# Altium PCB 20240913_WLAN_ESP32.PcbDoc
Units mm, origin at the board's own origin, x right, y up, seen from the top; angles counter-clockwise.
Board outline 30 x 54 mm, 2 copper layers (Top Layer, Bottom Layer), stack 1.471 mm thick; 28 components, 22 nets, 138 pads, 36 vias.
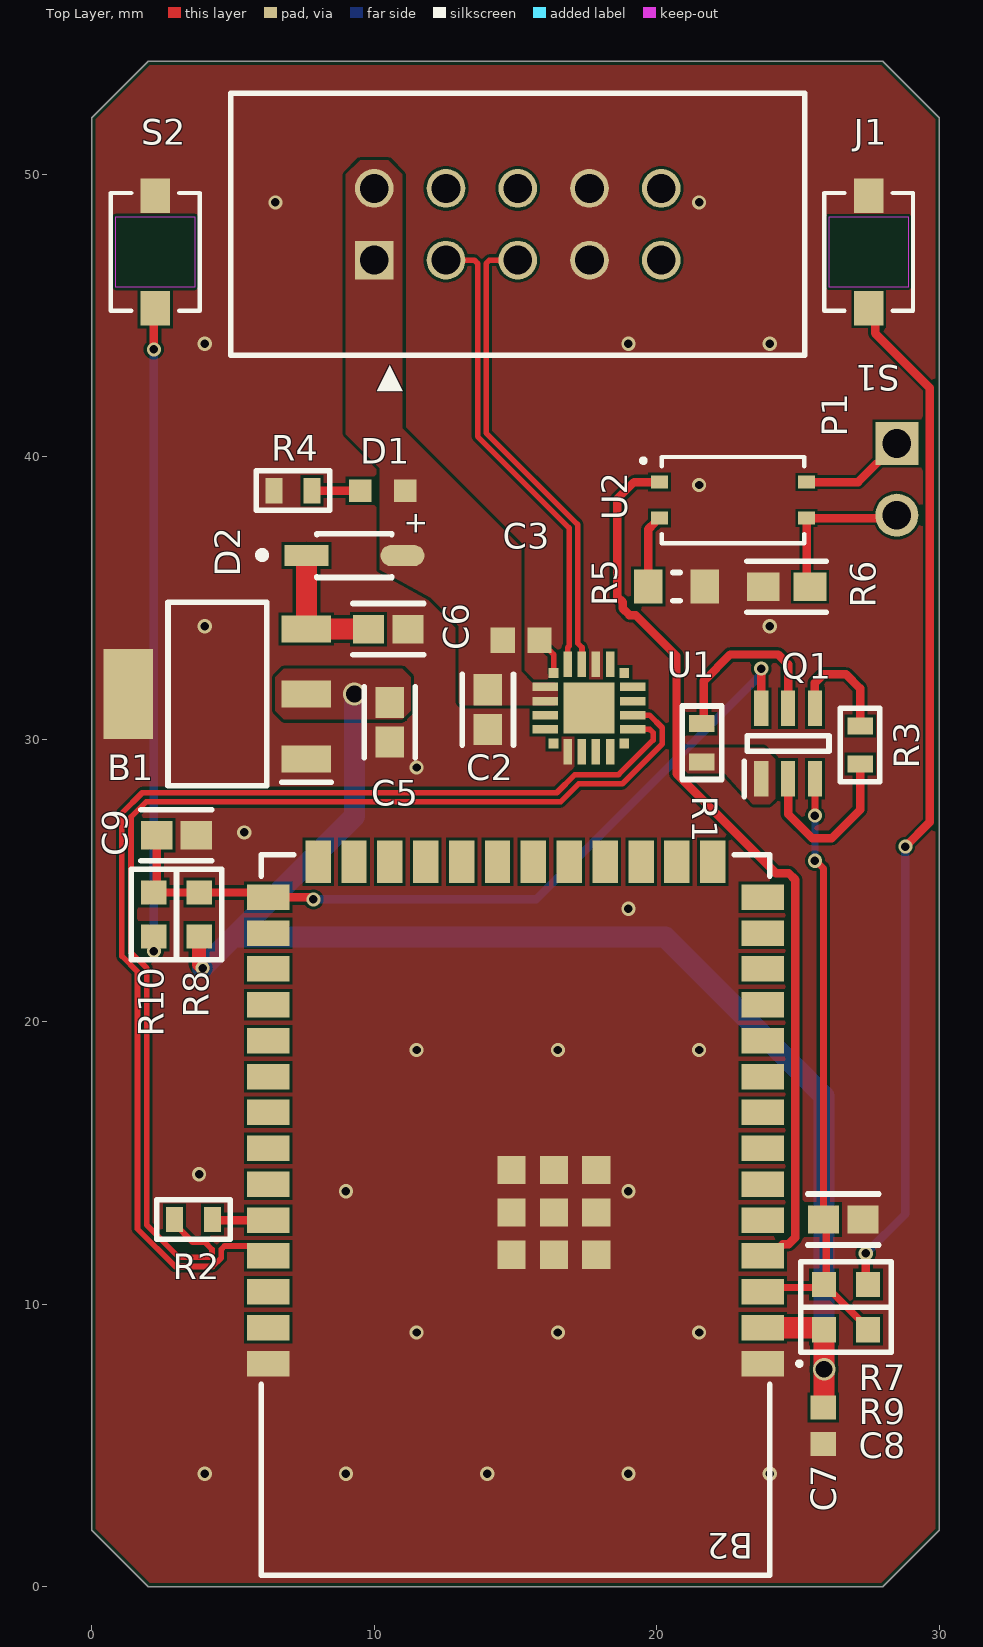
[diagram p0: Top Layer view]
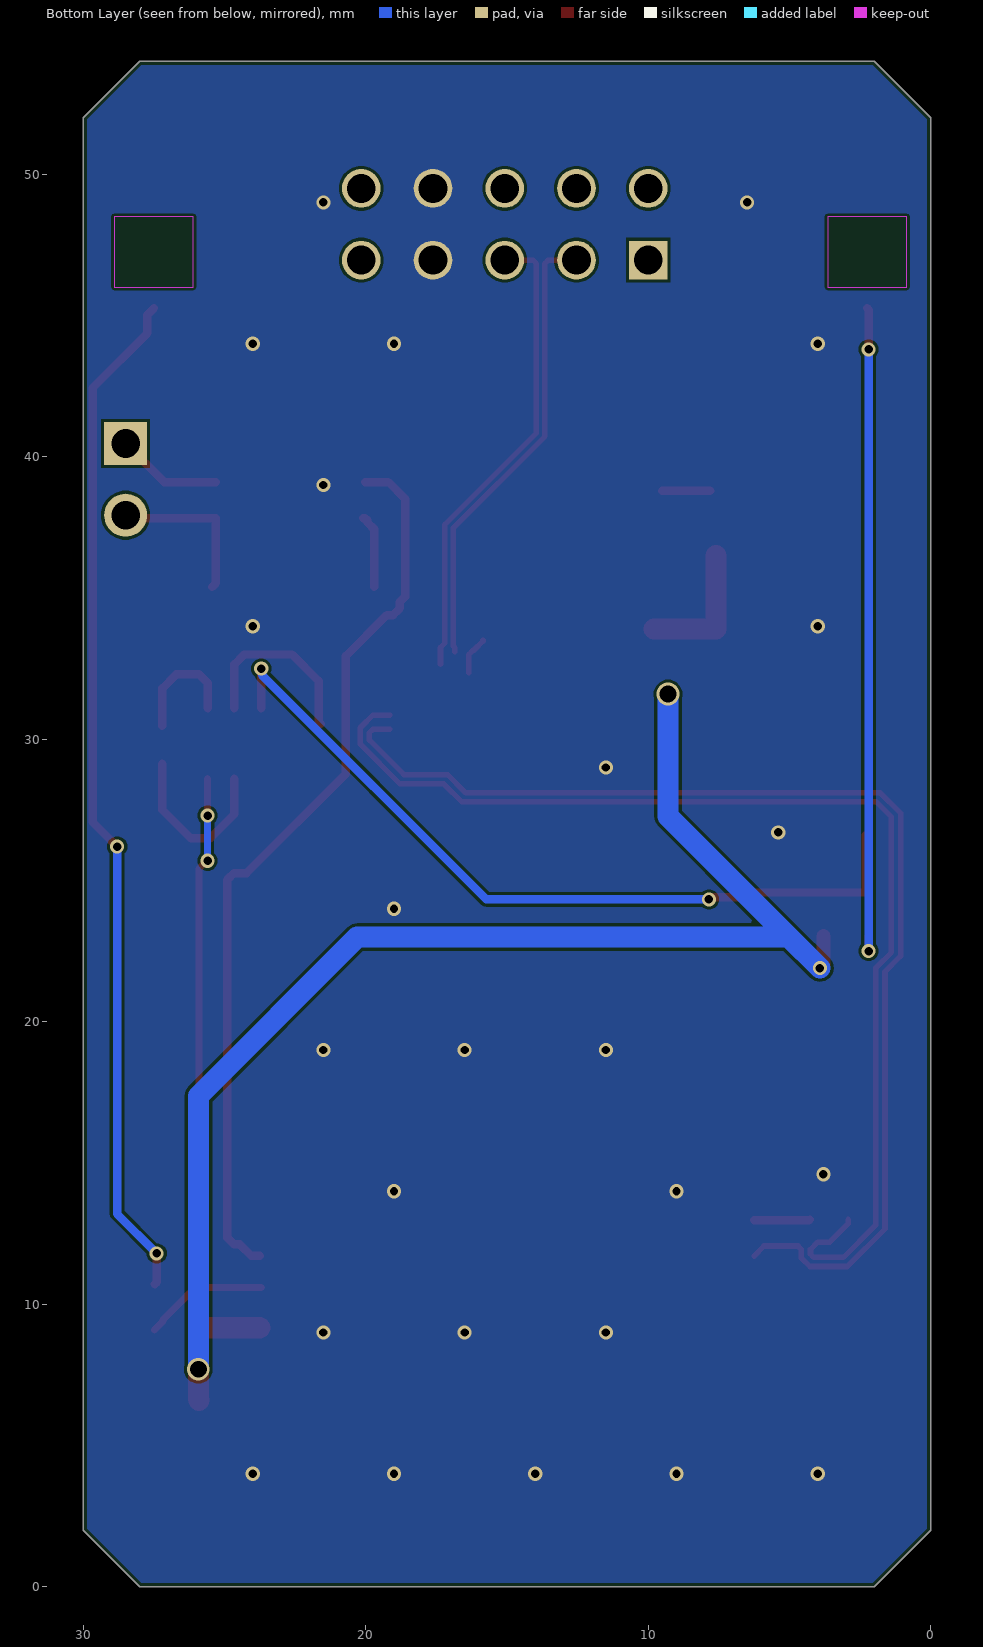
[diagram p1: Bottom Layer view, seen from below]
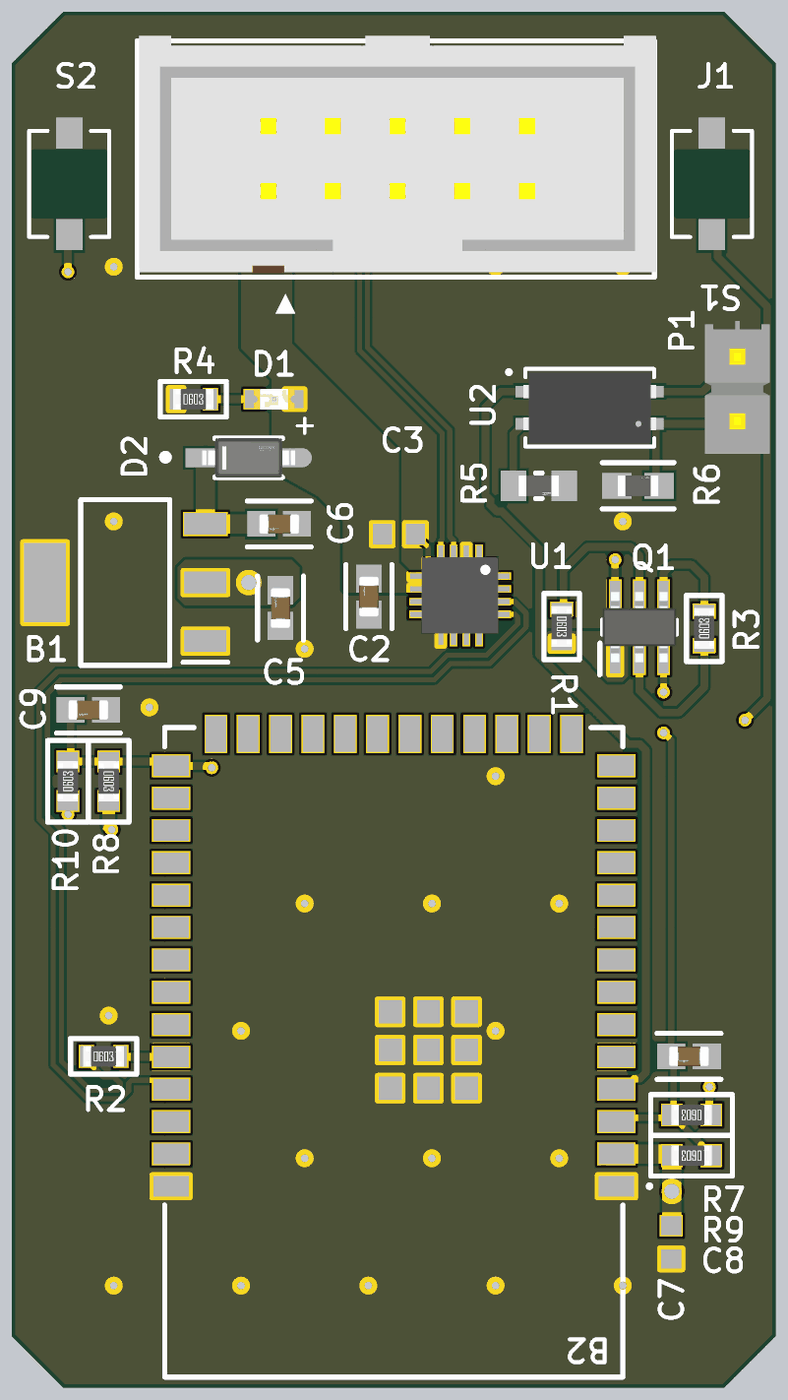
[diagram p2: 3D render of the assembled board from above, using the file's embedded part models]

## Layer stack, top to bottom
Top Solder: solder mask 0.0102, Solder Resist, Dk 3.5
Top Layer: signal copper 0.0356
Dielectric 1: dielectric 1.4, FR-4, Dk 4.8
Bottom Layer: signal copper 0.0356
Bottom Solder: solder mask 0.0102, Solder Resist, Dk 3.5

## Board outline
2,54 0,52 0,2 2,0 28,0 30,2 30,52 28,54

## Design rules (kind name [scope] priority, off if disabled: settings)
BoardOutlineClearance [All] p1: gap=0.125 ignorepadtopadclearanceinfootprint=FALSE
Clearance [All] p1: gap=0.1 ignorepadtopadclearanceinfootprint=FALSE
DiffPairsRouting DiffPairsRouting_1 [InDifferentialPairClass('TTL')] p1: maxlimit=0.254 minlimit=0.125 mostfreqgap=0.254 toplayer_minwidth=0.125 toplayer_maxwidth=0.381 toplayer_prefwidth=0.381 bottomlayer_minwidth=0.125 bottomlayer_maxwidth=0.381 bottomlayer_prefwidth=0.381 maxuncoupledlength=12.7
DiffPairsRouting nope [All] p2: maxlimit=0.127 minlimit=0.1 mostfreqgap=0.1 toplayer_minwidth=0.125 toplayer_maxwidth=0.401 toplayer_prefwidth=0.3 bottomlayer_minwidth=0.125 bottomlayer_maxwidth=0.401 bottomlayer_prefwidth=0.3 maxuncoupledlength=12.7
DiffPairsRouting [InDifferentialPairClass('USB')] p3: maxlimit=0.127 minlimit=0.1 mostfreqgap=0.127 toplayer_minwidth=0.125 toplayer_maxwidth=0.401 toplayer_prefwidth=0.401 bottomlayer_minwidth=0.125 bottomlayer_maxwidth=0.401 bottomlayer_prefwidth=0.401 impedanceprofiledriven=TRUE impedanceprofileid={B936E31F-32DF-40CF-8D27-86ADC99919BF} impedanceprofilevalue=90.000000 maxuncoupledlength=12.7
HoleToHoleClearance [All] p1: gap=0.125 allowstackedmicrovias=TRUE
MinimumSolderMaskSliver [All] p1: minsoldermaskwidth=0.125
PasteMaskExpansion [All] p1: expansion=-0.05
PlaneConnect [All] p1: planeconnectstyle=Direct reliefexpansion=0.508 reliefentries=4 reliefconductorwidth=0.254 reliefairgap=0.254
PolygonConnect [All] p1: connectstyle=Direct reliefconductorwidth=0.254 reliefentries=4 polygonreliefangle="90 Angle" airgapwidth=0.254
RoutingVias [All] p1: holewidth=0.711 width=1.27 viastyle="Through Hole" minholewidth=0.711 minwidth=1.27 maxholewidth=0.711 maxwidth=1.27
SilkToSilkClearance [All] p1: silktosilkclearance=0.125
SilkToSolderMaskClearance [IsPad] p1: minsilkscreentomaskgap=0.125 clearancetoexposedcopper=TRUE
SolderMaskExpansion [All] p1: expansion=0.102 istentingtop=FALSE
SupplyNets "Schematic Supply Nets_2" [InNet('VUSB')] p1: voltage=0.000
SupplyNets "Schematic Supply Nets_1" [InNet('GND')] p2: voltage=0.000
SupplyNets "Schematic Supply Nets" [InNet('+3V3')] p3: voltage=0.000
Width [All] p1: maxlimit=5 minlimit=0.125 preferedwidth=0.254 minimp=50.000000 maximp=50.000000 favimp=50.000000
23 further rules are at their usual default settings.

## Classes and differential pairs
differential pair class TTL: TXD
differential pair class USB: Data
component class Designator: C2 C3 J1 Q1 R1 R2 R3 U1
differential pair TXD: +TXD_P -TXD_N
differential pair Data: +Data_P -Data_N

## Components (designator, comment, footprint, x,y, rotation, side; value= is the part's Value field where it differs from the comment)
B1 "LM1117MPX-3.3_NOPB" SOT230P700X180-4N 4.45,31.6 r180 top
B2 "ESP32-S3-WROOM-2-N32R8V" ESP32S3WROOM2N32R8V 15,13.16 r180 top
C2 "GRM188R61E106MA73J" FP-GRM188-0_2-IPC_B 14.025,31.05 r90 top value=10µF
C3 "06035C104KAT4A" CAPC1608X90X35LL15T15 15.2,33.5 r180 top value=100nF
C5 "GRM188R61E106MA73J" FP-GRM188-0_2-IPC_B 10.55,30.601 r90 top value=10µF
C6 "GRM188R61E106MA73J" FP-GRM188-0_2-IPC_B 10.5,33.9 r180 top value=10µF
C7 "06035C104KAT4A" CAPC1608X90X35LL15T15 25.9,5.7 r90 top value=100nF
C8 "GRM188R61E106MA73J" FP-GRM188-0_2-IPC_B 26.6,13 r180 top value=10µF
C9 "GRM188R61E106MA73J" FP-GRM188-0_2-IPC_B 3,26.6 r180 top value=10µF
D1 "150060RS75020" WL-SMCW_0603_H=0.25mm 10.3,38.8 r0 top
D2 "1N5819HW-7-F" FP-SOD123-IPC_A 9.3,36.5 r0 top
J1 "TST-105-01-S-D" TST-105-01-S-D-Footprint-1 10,46.96 r0 top
P1 "STL1X02" TSW-102-07-XXX-S 28.5,39.2 r270 top
Q1 "BCM847DS" SOT95P275X110-6N 24.65,29.85 r90 top
R1 "RC0603FR-0718KL" "RESC1608X06L 0603 High Density" 21.6,29.875 r270 top value=12K
R2 "RC0603FR-07470RL" "RESC1608X06L 0603 High Density" 3.6,13 r0 top value=470
R3 "RC0603FR-0718KL" "RESC1608X06L 0603 High Density" 27.2,29.8 r90 top value=12K
R4 "RG1608P-102-B-T5" "RESC1608X06L 0603 High Density" 7.125,38.8 r0 top value=1k
R5 "RC-5kOhm" FP-RG1608-MFG 20.7,35.4 r0 top value=50
R6 "CR0603-JW-101ELF" FP-CR0603-IPC_A 24.6,35.4 r0 top value=100
R7 "RG1608P-1052-B-T5" "RESC1608X06N 0603 Medium Density" 26.7,9.1 r180 top value=10.5k
R8 "RG1608P-1052-B-T5" "RESC1608X06N 0603 Medium Density" 3.8,23.8 r270 top value=10.5k
R9 "RC0603FR-07470RL" "RESC1608X06N 0603 Medium Density" 26.7,10.7 r180 top value=470
R10 "RC0603FR-07470RL" "RESC1608X06N 0603 Medium Density" 2.2,23.8 r90 top value=470
S1 "TL1015AF160QG" SW_F160QG_EWI 27.5,47.25 r270 top
S2 "TL1015AF160QG" SW_F160QG_EWI 2.25,47.25 r270 top
U1 "CP2102N-A02-GQFN20" WFQFN-20 17.6,31.1 r270 top
U2 "PS2911-1-F3-AX" PS2911-1-F3-AX-Footprint-1 22.7,38.465 r0 top

## Footprints (in the part's own frame and the unit in brackets; to place one, negate y for a bottom-side part, rotate by r counter-clockwise, add the part's x,y. Pads: shape width x height; smd on the part's side, far side on the other; paste and mask are expansions set on the pad)
CAPC1608X90X35LL15T15 [mm] "Chip Capacitor, 2-Leads, Body 1.60x0.81mm, IPC High Density"
  rect 0.85x0.9 smd: 1(-0.65,0) 2(0.65,0)
  body extent -0.88,-0.48 0.87,0.48, height 0.9
ESP32S3WROOM2N32R8V [mm]
  rect 1.5x0.9 smd: 1(-8.75,5.26) 2(-8.75,3.99) 3(-8.75,2.72) 4(-8.75,1.45) 5(-8.75,0.18) 6(-8.75,-1.09) 7(-8.75,-2.36) 8(-8.75,-3.63) 9(-8.75,-4.9) 10(-8.75,-6.17) 11(-8.75,-7.44) 12(-8.75,-8.71) 13(-8.75,-9.98) 14(-8.75,-11.25) 27(8.75,-11.25) 28(8.75,-9.98) 29(8.75,-8.71) 30(8.75,-7.44) 31(8.75,-6.17) 32(8.75,-4.9) 33(8.75,-3.63) 34(8.75,-2.36) 35(8.75,-1.09) 36(8.75,0.18) 37(8.75,1.45) 38(8.75,2.72) 39(8.75,3.99) 40(8.75,5.26)
  rect 0.9x1.5 smd: 15(-6.985,-12.5) 16(-5.715,-12.5) 17(-4.445,-12.5) 18(-3.175,-12.5) 19(-1.905,-12.5) 20(-0.635,-12.5) 21(0.635,-12.5) 22(1.905,-12.5) 23(3.175,-12.5) 24(4.445,-12.5) 25(5.715,-12.5) 26(6.985,-12.5)
  rect 1x1 smd: 41(-1.36,-0.09) 42(-2.86,1.41) 43(-2.86,-0.09) 44(-2.86,-1.59) 45(-1.36,-1.59) 46(0.14,-1.59) 47(0.14,-0.09) 48(0.14,1.41) 49(-1.36,1.41)
  silkscreen extent -10.1,-12.75 9,12.75
FP-CR0603-IPC_A [mm]
  rect 1.158x1.012 smd paste+0 mask+0: 1(-0.827,0) 2(0.827,0)
  silkscreen extent -1.41,-0.91 1.41,0.91, body extent -1.91,-1.01 1.91,1.01, height 0.25
FP-GRM188-0_2-IPC_B [mm]
  rect 1.105x1.006 smd paste+0 mask+0: 1(-0.701,0) 2(0.701,0)
  silkscreen extent -1.25,-0.9 1.25,0.9, body extent -1.5,-0.75 1.5,0.75, height 0.25
FP-RG1608-MFG [mm]
  rect 1x1.2 smd paste+0 mask+0: 1(-1,0) 2(1,0)
  silkscreen extent -0.13,-0.5 0.13,0.5, body extent -1.6,-0.7 1.6,0.7, height 0.25
FP-SOD123-IPC_A [mm]
  rect 1.557x0.742 smd paste+0 mask+0: 1(-1.7,0)
  rrect100% 1.557x0.742 smd paste+0 mask+0: 2(1.7,0)
  silkscreen extent -3.39,-0.77 1.33,0.77, body extent -2.98,-1.28 2.98,1.28, height 0.25
PS2911-1-F3-AX-Footprint-1 [mil]
  rect 24x18 smd paste+0 mask+0: 1(-102.5,25) 2(-102.5,-25) 3(102.5,-25) 4(102.5,25)
  silkscreen extent -128,-60 100,60, body extent -103,-55 103,55, height 83
"RESC1608X06L 0603 High Density" [mm] "Chip Resistor, 2-Leads, Body 1,60x0,80mm, IPC High Density"
  rect 0.6x0.9 smd: 1(-0.675,0) 2(0.675,0)
  silkscreen extent -1.3,-0.7 1.3,0.7, body extent -0.8,-0.4 0.8,0.4, height 0.45
"RESC1608X06N 0603 Medium Density" [mm] "Chip Resistor, 2-Leads, Body 1,60x0,80mm, IPC Medium Density"
  rect 0.85x0.9 smd: 1(-0.775,0) 2(0.775,0)
  silkscreen extent -1.6,-0.8 1.6,0.8, body extent -0.8,-0.4 0.8,0.4, height 0.45
SOT95P275X110-6N [mm]
  rect 1.25x0.5 smd: 1(-1.25,0.95) 2(-1.25,0) 3(-1.25,-0.95) 4(1.25,-0.95) 5(1.25,0) 6(1.25,0.95)
  silkscreen extent -1.88,-1.45 0.28,1.55, body extent -1.38,-1.45 1.38,1.45, height 1.1
SOT230P700X180-4N [mm]
  rect 1.75x0.95 smd: 1(-3.15,2.3) 2(-3.15,0) 3(-3.15,-2.3)
  rect 1.75x3.2 smd: 4(3.15,0)
  silkscreen extent -4.03,-3.25 1.75,3.25
SW_F160QG_EWI [mil]
  rect 48x41 smd paste+0 mask+0: 1(-78.5,0) 2(78.5,0)
  Keep-Out Layer region: -49.21,-55 -49.21,55 49.21,55 49.21,-55
  silkscreen extent -82,-62 82,62
TST-105-01-S-D-Footprint-1 [mm]
  rect 1.37x1.37 hole 1.02: 1(0,0)
  round 1.37 hole 1.02: 2(0,2.54) 3(2.54,0) 4(2.54,2.54) 5(5.08,0) 6(5.08,2.54) 7(7.62,0) 8(7.62,2.54) 9(10.16,0) 10(10.16,2.54)
  silkscreen extent -5.08,-3.36 15.24,5.9, body extent -5.01,-3.17 15.31,6.1, height 8.89
TSW-102-07-XXX-S [mil]
  rect 60x60 hole 40: 1(-50,0)
  round 60 hole 40 mask+3: 2(50,0)
  body extent -105,-50 100,50, height 330
WFQFN-20 [mm]
  rect 0.35x0.35 smd: 1(-1.25,1.25) 6(-1.25,-1.25) 11(1.25,-1.25) 16(1.25,1.25)
  rect 0.9x0.3 smd: 2(-1.55,0.75) 3(-1.55,0.25) 4(-1.55,-0.25) 5(-1.55,-0.75) 12(1.55,-0.75) 13(1.55,-0.25) 14(1.55,0.25) 15(1.55,0.75)
  rect 0.3x0.9 smd: 7(-0.75,-1.55) 8(-0.25,-1.55) 9(0.25,-1.55) 10(0.75,-1.55) 17(0.75,1.55) 18(0.25,1.55) 19(-0.25,1.55) 20(-0.75,1.55)
  rect 1.8x1.8 smd: EXP(0,0)
  body extent -1.5,-1.5 1.5,1.5, height 0.8
WL-SMCW_0603_H=0.25mm [mm] "SMD Mono-color Chip LED, body 1.6x0.8mm"
  rect 0.8x0.8 smd: 1(-0.8,0) 2(0.8,0)
  body extent -0.8,-0.4 0.8,0.4, height 0.25

## Part data
B1: "Space saving 800-mA low-dropout linear regulator with internal current limit", Manufacturer_Name="Texas Instruments", Manufacturer_Part_Number=LM1117MPX-3.3/NOPB, Mouser Part Number=926-LM1117MPX3.3NOPB, Datasheet Link=http://www.ti.com/lit/ds/symlink/lm1117.pdf, Geometry.Height=1.8mm, Mouser Price/Stock=https://www.mouser.co.uk/ProductDetail/Texas-Instruments/LM1117MPX-3.3-NOPB?qs=X1J7HmVL2ZHRbBIxXi4utg%3D%3D
B2: "WiFi Modules - 802.11 [ENGINEERING SAMPLES] SMD Module, ESP32-S3R8 with 1.8V 8 MB Octal PSRAM, 32 MB Octal SPI Flash, PCB Antenna", Manufacturer_Name="Espressif Systems", Mouser Part Number=356-ESP3S3WRM2N32R8V, Datasheet Link=https://www.espressif.com/sites/default/files/documentation/esp32-s3-wroom-2_datasheet_en.pdf, Geometry.Height=3.25mm, Manufacturer_Part_Number=ESP32-S3-WROOM-2-N32R8V, Mouser Price/Stock=https://www.mouser.co.uk/ProductDetail/Espressif-Systems/ESP32-S3-WROOM-2-N32R8V?qs=Li%252BoUPsLEntC3FaT%2FvCeug%3D%3D
C2 C5 C6 C8 C9: library part CMP-001-00049-1, "Ceramic Capacitor, Multilayer, Ceramic, 25V, 20% +Tol, 20% -Tol, X5R, 15% TC, 10uF, Surface Mount, 0603", Capacitor Type=Ceramic, Case/Package=0603, Max Operating Temperature=85°C, Min Operating Temperature=-55°C, Package Shape=Rectangular, Package Style=SMTMeter, Rated DC Voltage (URdc)=25V, Temperature Characteristics Code=X5R, Tolerance  (fill in as +-)=20%, Dielectric Material=Ceramic, Height=0.8mm, JESD-609 Code=e3, Length=1.6mm, Mounting Technology="Surface Mount", Multilayer=Yes, Packaging="Tape and Reel", Pins=2, Reach SVHC Compliant=Yes, RoHS Compliant=Yes, Terminal Finish=Nickel, Termination=Wraparound, Tolerance (fill in as +-)=20%, Width=0.8mm
C3 C7: library part CMP-001-00048-2, "Ceramic Capacitor, Multilayer, Ceramic, 50V, 10% +Tol, 10% -Tol, X7R, 15% TC, 0.1uF, Surface Mount, 0603", Capacitance="100 nF", Capacitor Type=Ceramic, Case/Package=0603, Max Operating Temperature=125°C, Min Operating Temperature=-55°C, Package Shape=Rectangular, Package Style=SMTMeter, Rated DC Voltage (URdc)=50V, Temperature Characteristics Code=X7R, Tolerance=10%, Dielectric Material=Ceramic, Height=0.9mm, JESD-609 Code=e3, Length=1.6mm, Mounting Technology="Surface Mount", Multilayer=Yes, Packaging="Tape and Reel", Pins=2, Reach SVHC Compliant=Yes, RoHS Compliant=Yes, Terminal Finish=Nickel, Termination=Wraparound, Tolerance  (fill in as +-)=10%, Tolerance (fill in as +-)=10%, Voltage Rating=50V, Width=0.81mm
D1: library part CMP-029-000007-2, "WL-SMCW SMT Mono-color Chip LED Waterclear, size 0603, Red, 2V, 140deg", Emitting Color=Red, Forward Voltage typ.=2V, Operating Temperature="-40 to +85degC", Chip Technology=AlInGaP, ComponentLink1Description=Manufacturer, ComponentLink1URL=http://www.we-online.de, ComponentLink2Description=Datasheet, ComponentLink2URL=https://www.we-online.com/catalog/datasheet/150060RS75020.pdf, Design Item ID=150060RS75020, Dominant Wavelength typ.=625nm, Luminous Intensity typ.=100mcd, Mounting Technology=SMT, Packaging="Tape and Reel", Part Number=150060RS75020, Peak Wavelength typ.=630nm, Published Date="March 2020", Publisher="Wurth Elektronik", Size=0603, Source=WL-SMCW_0603.SchLib, Viewing Angle=140deg
D2: library part CMP-0303-00003-3, "DIODE SCHOTTKY 40V 1A SOD123", Average Rectified Current=1A, Capacitance=110pF, Case/Package=SOD-123-2, Forward Voltage=450mV, Max Forward Surge Current (Ifsm)=25A, Max Operating Temperature=125°C, Max Power Dissipation=450mW, Max Repetitive Reverse Voltage (Vrrm)=40V, Min Operating Temperature=-65°C, Package Quantity=3000, Peak Reverse Current=50uA, Contact Plating=Tin, Current Rating=1A, Element Configuration=Single, Forward Current=1A, Height=1.25mm, Lead Free="Lead Free", Length=2.85mm, Max Reverse Voltage (DC)=40V, Number of Pins=2, Output Current=1A, Packaging="Tape and Reel", Peak Non-Repetitive Surge Current=25A, Polarity=Standard, Radiation Hardening=No, REACH SVHC="No SVHC", Termination=SMD/SMT, Voltage Rating (DC)=40V, Weight=0.000353oz, Width=1.7mm
J1: library part CMP-002-00096-2, "Board Connector, 10 Contact(s), 2 Row(s), Male, Straight, 0.1 inch Pitch, Solder Terminal, Locking, Black Insulator, Receptacle", Max Operating Temperature=125°C, Min Operating Temperature=-55°C, Connector Type="BOARD CONNECTOR", Mounting Technology=Board, RoHS Compliant=Yes
P1: library part CMP-061-000008-4, "Stiftleiste, 2-Pin", Component Type=Standard, Design Item ID=STL1X02, Pin Count=2, Source=Pin_Header.SchLib
Q1: library part CMP-011-000000-2, "Trans GP BJT NPN 45V 0.1A 6-Pin TSOP T/R", Case/Package=TSOP, Collector Base Voltage (VCBO)=50V, Collector Emitter Breakdown Voltage=45V, Emitter Base Voltage (VEBO)=6V, Frequency=250MHz, Manufacturer 1="NXP Semiconductors", Manufacturer Part Number 1=BCM847DS,135, Max Collector Current=100mA, Max Operating Temperature=150°C, Max Power Dissipation=380mW, Min Operating Temperature=-65°C, Package Quantity=1, Category=BJTs, Collector Emitter Voltage (VCEO)=45V, Component Type=Standard, ComponentLink1Description=https://datasheet.ciiva.com/4725/bcm847bv-bs-ds-188878-4725172.pdf?src-supplier=Mouser, ComponentLink1URL=https://datasheet.ciiva.com/4725/bcm847bv-bs-ds-188878-4725172.pdf?src-supplier=Mouser, ComponentLink2Description=https://datasheet.ciiva.com/968/bcm847bv-bs-ds-968728.pdf?src-supplier=Digi-Key, ComponentLink2URL=https://datasheet.ciiva.com/968/bcm847bv-bs-ds-968728.pdf?src-supplier=Digi-Key, ComponentLink3Description=https://datasheet.ciiva.com/968/bcm847bv-bs-ds-968729.pdf?src-supplier=Digi-Key, ComponentLink3URL=https://datasheet.ciiva.com/968/bcm847bv-bs-ds-968729.pdf?src-supplier=Digi-Key, ComponentLink4Description=https://datasheet.ciiva.com/968/bcm847bv-bs-ds-968730.pdf?src-supplier=Digi-Key, ComponentLink4URL=https://datasheet.ciiva.com/968/bcm847bv-bs-ds-968730.pdf?src-supplier=Digi-Key, ComponentLink5Description=https://datasheet.ciiva.com/11204/bcm847bv-bs-ds-11204107.pdf?src-supplier=Avnet, ComponentLink5URL=https://datasheet.ciiva.com/11204/bcm847bv-bs-ds-11204107.pdf?src-supplier=Avnet, Contact Plating=Tin, Design Item ID=BCM847DS, Element Configuration=Dual, Gain Bandwidth Product=250MHz, Max Breakdown Voltage=45V, Mount="Surface Mount", Number of Elements=2, Number of Pins=6, Packaging="Tape and Reel", Pin Count=6, Polarity=NPN, Power Dissipation=380mW, Pricing 1="1=0,43000, 10=0,32700, 25=0,29520, 100=0,15560, 250=0,15396, 500=0,13788, 1000=0,10730, 2500=0,09818, 5000=0,09389 (USD)", Radiation Hardening=No, RoHS=Yes, Source=SiCeff_Parameter_V2.SCHLIB, Stock 1=7614, Transition Frequency=250MHz
R1 R3: library part CMP-009-00172-1, "SMD Chip Resistor, 18 kOhm, ± 1%, 100 mW, 0603 [1608 Metric], Thick Film, General Purpose", Case/Package=0603, Max Operating Temperature=155°C, Min Operating Temperature=-55°C, Power=100mW, Temperature Coefficient=100ppm/°C, Tolerance=1%, Voltage Rating=75V, Depth=0.8mm, Height=0.45mm, Length=1.6mm, Mounting Technology="Surface Mount", Pins=2, RoHS Compliant=Yes
R2 R9 R10: library part CMP-009-00156-1, "Res Thick Film 0603 470 Ohm 1% 0.1W(1/10W) ±100ppm/C Pad SMD T/R", Case/Package=0603, Max Operating Temperature=155°C, Min Operating Temperature=-55°C, Power=100mW, Temperature Coefficient=100ppm/°C, Tolerance=1%, Voltage Rating=50V, Depth=0.8mm, Height=0.022inch, Length=0.063inch, Mounting Technology="Surface Mount", Pins=2, RoHS Compliant=Yes
R4: library part CMP-009-00031-4, "SUSUMU - RG1608P-102-B-T5 - RES, THIN FILM, 1K, 0.1%, 0.1W, 0603", Case Code (Imperial)=0603, Case Code (Metric)=1608, Max Operating Temperature=155°C, Max Power Dissipation=100mW, Min Operating Temperature=-55°C, Resistance=1kR, Resistor Type="Thin Film", Temperature Coefficient=25ppm/°C, Tolerance=0.1%, Voltage Rating=100V, Voltage Rating (DC)=75V, Case/Package=0603, Construction=Rectangular, Depth=0.8mm, Features="Automotive AEC-Q200,Anti-Sulfur", Height=0.4mm, Lead Free="Lead Free", Length=1.6mm, Military Standard=Not, Number of Terminations=2, Packaging="Tape and Reel", Power Rating=100mW, RoHS Compliant=Yes, Series=RG, Technology="THIN FILM", Termination=SMD/SMT, Weight=7.1E-05oz, Width=0.8mm, Working Voltage=100V
R5: library part CMP-009-00170-1, "RES SMD 5 kOHM 0.05% 1/10W 0603", Case Code (Imperial)=0603, Case Code (Metric)=1608, Max Operating Temperature=155°C, Max Power Dissipation=100mW, Min Operating Temperature=-55°C, Package Quantity=1, Power Rating=62.5mW, Resistance=680R, Resistor Type="Thin Film", Temperature Coefficient=10ppm/°C, Tolerance=0.05%, Voltage Rating=75V, Working Voltage=100V, Case/Package=0603, Construction=Rectangular, Depth=0.8mm, Features="Automotive AEC-Q200", Height=0.02inch, Lead Free="Lead Free", Length=0.063inch, Military Standard=Not, Number of Terminations=2, Packaging="Tape and Reel", RoHS Compliant=Yes, Series=RG, Technology="THIN FILM", Termination=SMD/SMT, Voltage Rating (DC)=75V, Weight=7.1E-05oz, Width=0.031inch
R6: library part CMP-009-00203-1, "Fixed Resistor, Metal Glaze/thick Film, 0.1W, 100ohm, 75V, 5% +/-Tol, 200ppm/Cel, Surface Mount, 0603", Case/Package=0603, JLCPCB Part #=C913237, Max Operating Temperature=155°C, Min Operating Temperature=-55°C, Power=100mW, Tolerance=5%, Mounting Technology="Surface Mount", Pins=2, RoHS Compliant=Yes
R7 R8: library part CMP-009-00046-3, "TR / Thin Film Chip Resistors 0603 size, 1/10W, 10.5K ohm, 0.1%, 25ppm", Case Code (Imperial)=0603, Case Code (Metric)=1608, Max Operating Temperature=155°C, Max Power Dissipation=100mW, Min Operating Temperature=-55°C, Resistance=10.5kR, Resistor Type="Thin Film", Temperature Coefficient=25ppm/°C, Tolerance=0.1%, Voltage Rating=100V, Voltage Rating (DC)=75V, Case/Package=0603, Features="Automotive AEC-Q200,Anti-Sulfur", Height=0.4mm, Lead Free="Lead Free", Length=1.6mm, Number of Terminations=2, Packaging="Tape and Reel", Power Rating=100mW, RoHS Compliant=Yes, Series=RG, Termination=SMD/SMT, Weight=7.1E-05oz, Width=0.8mm
S1 S2: "No Description Available", Mfr_Name=E-Switch
U1: "USB Bridge, USB to UART USB 2.0 UART Interface 20-QFN (3x3)", Package="WFQFN-20 Silicon Labs", Availability="In Stock", Check_prices=https://www.snapeda.com/parts/CP2102N-A02-GQFN20/Silicon+Labs/view-part/?ref=eda, MF="Silicon Labs", MP=CP2102N-A02-GQFN20, Price=None, Purchase-URL=https://pricing.snapeda.com/search/part/CP2102N-A02-GQFN20/?ref=eda, SnapEDA_Link=https://www.snapeda.com/parts/CP2102N-A02-GQFN20/Silicon+Labs/view-part/?ref=snap
U2: library part CMP-00026-00000-3, "RENESAS - PS2911-1-F3-AX - OPTOKOPPLER,TR O/P,USOP-4"

## Via types
v1: diameter 0.5, hole 0.3, Top Layer to Bottom Layer, 34 vias
v2: diameter 0.8, hole 0.6, Top Layer to Bottom Layer, 2 vias

## Nets (pads, with @x,y where several pads share a name; then routed paths per layer and width w, separated by ;. In a path a pad name is that pad's centre, name@x,y a point inside that pad or via, vN(x,y) a via of type N, cw(c..) or ccw(c..) an arc to the next point about the centre after c; other vN are vias at no path point)
+3V3: B1.2 B2.2 C5.2 C7.2 R7.2 R8.2 | length 50.7
  Top Layer w0.5: R8.2 3.8,22.025 v1(3.925,21.9)
  Top Layer w0.75: B2.2 R7.2@25.925,9.17 ; C7.2@25.9,6.6 25.925,6.625 v2(25.925,7.7) R7.2
  Bottom Layer w0.75: v1(3.925,21.9) 5.025,23 ; v2(9.3,31.6) 9.3,27.275 5.025,23 ; v2(25.925,7.7) 25.925,17.375 20.3,23 5.025,23
Data_N: J1.3 U1.5 | length 16.3
  Top Layer w0.2: J1.3 13.543,46.96 13.66,46.843 13.66,40.716 16.9,37.476 16.9,33.301 16.846,33.247 16.846,33.1
Data_P: J1.5 U1.4 | length 16.8
  Top Layer w0.2: J1.5 14.077,46.96 13.96,46.843 13.96,40.84 17.2,37.6 17.2,33.401 17.354,33.247 U1.4@17.354,32.65
DTR: Q1.1 R1.2
EN: B2.3 C8.2 Q1.3 R7.1 R9.2 | length 22.6
  Top Layer w0.254: B2.3@23.69,10.59 25.815,10.59 R9.2 ; v1(25.6,25.7) 25.628,25.7 25.899,25.428 C8.2 ; v1(25.6,27.3) Q1.3 ; C8.2@25.999,13 25.999,10.774 R9.2 ; R7.1 27.177,9.398 27.177,9.448 26.248,10.377 26.223,10.377 25.925,10.675 R9.2
  Bottom Layer w0.254: v1(25.6,25.7) 25.606,25.706 25.606,26.451 25.6,26.457 v1(25.6,27.3)
GND: B1.1 B1.4 B2.1 B2.40 B2.41 B2.42 B2.43 B2.44 B2.45 B2.46 B2.47 B2.48 B2.49 C2.1 C3.1 C5.1 C6.1 C7.1 C8.1 C9.1 J1.7 J1.8 R4.1 R5.2 R6.1 S1.1 S2.1 U1.3 U1.6 U1.12 | length 1.4
  Top Layer w0.2: C3.1 15.85,33.475 16.175,33.15 16.2,33.15 16.35,33 U1.6
  other v1: 4,4 9,4 14,4 19,4 24,4 11.5,9 16.5,9 21.5,9 9,14 19,14 3.8,14.6 11.5,19 16.5,19 21.5,19 19,24 5.4,26.7 11.5,29 4,34 24,34 21.5,39 4,44 19,44 24,44 6.5,49 21.5,49
I04: B2.4 U2.1 | length 32.2
  Top Layer w0.3: U2.1@20.02,39.1 19.2,39.1 18.6,38.5 18.6,35.05 18.796,34.854 18.796,34.633 19.033,34.396 19.254,34.396 20.7,32.95 20.7,28.779 24.215,25.264 24.667,25.264 24.904,25.027 24.904,12.363 24.667,12.126 24.466,12.126 24.05,11.71 B2.4
IO0: B2.27 C9.2 Q1.6 R8.1 R10.2 | length 28.6
  Top Layer w0.3: C9.2@2.2,26.501 C9.2 2.299,24.674 R10.2 R8.1 B2.27@6.175,24.575 ; B2.27 6.26,24.4 7.726,24.4 7.796,24.33 v1(7.85,24.33) ; Q1.6 v1(23.7,32.5)
  Bottom Layer w0.3: v1(7.85,24.33) 15.73,24.33 23.662,32.262 23.662,32.462 v1(23.7,32.5)
NetB1_3: B1.3 C6.2 D2.1 | length 4.8
  Top Layer w0.75: D2.1 B1.3 C6.2
NetB2_36: B2.36 R2.2 | length 2
  Top Layer w0.3: R2.2 4.295,12.98 B2.36
NetD1_1: D1.1 R4.2 | length 1.7
  Top Layer w0.3: R4.2 D1.1
NetQ1_2: Q1.2 R3.1 | length 6.2
  Top Layer w0.3: Q1.2 24.65,27.35 25.5,26.5 26.2,26.5 27.2,27.5 R3.1
NetQ1_5: Q1.5 R1.1 | length 6.6
  Top Layer w0.3: R1.1 21.668,30.618 21.668,32.068 22.6,33 24.3,33 24.65,32.65 Q1.5
NetR5_1: R5.1 U2.2 | length 2.6
  Top Layer w0.3: R5.1 19.7,37.433 19.942,37.675 19.942,37.751 20.02,37.83 U2.2
NetR9_1: R9.1 S1.2 | length 36.4
  Top Layer w0.3: v1(27.4,11.8) 27.4,10.775 R9.1 ; S1.2 27.728,45.028 27.728,44.372 29.666,42.434 29.666,27.066 v1(28.8,26.2)
  Bottom Layer w0.3: v1(27.4,11.8) 28.8,13.2 v1(28.8,26.2)
NetR10_1: R10.1 S2.2 | length 23.3
  Top Layer w0.3: v1(2.2,22.504) R10.1 ; v1(2.2,43.8) 2.2,45.206 S2.2
  Bottom Layer w0.3: v1(2.2,22.504) v1(2.2,43.8)
RTS: Q1.4 R3.2 | length 4.2
  Top Layer w0.3: Q1.4 25.6,32 25.9,32.3 26.7,32.3 27.2,31.8 R3.2
SIN: P1.1 U2.4 | length 3.8
  Top Layer w0.3: U2.4 27.13,39.1 P1.1
SOUT: P1.2 R6.2 U2.3 | length 5.7
  Top Layer w0.3: R6.2 25.303,35.523 U2.3 28.4,37.83 P1.2
TXD_N: R2.1 U1.18 | length 41.2
  Top Layer w0.2: R2.1 2.925,12.85 3.579,12.196 4.006,12.196 4.259,11.943 4.259,11.777 4.142,11.66 3.091,11.66 1.946,12.805 1.946,21.903 1.393,22.456 1.393,27.25 1.925,27.782 16.597,27.782 17.236,28.421 18.781,28.421 20.196,29.836 20.196,30.405 19.747,30.854 19.154,30.854 U1.18
TXD_P: B2.37 U1.17 | length 41.7
  Top Layer w0.2: B2.37 5.9,12.06 4.701,12.06 4.584,11.943 4.584,11.643 4.276,11.335 2.956,11.335 1.621,12.67 1.621,21.769 1.068,22.322 1.068,27.384 1.791,28.107 16.463,28.107 17.102,28.746 18.647,28.746 19.871,29.97 19.871,30.233 19.754,30.35 U1.17
VUSB: C2.2 C3.2 D1.2 D2.2 J1.1 J1.2 U1.7 U1.8
pads on no net: B2.5 B2.6 B2.7 B2.8 B2.9 B2.10 B2.11 B2.12 B2.13 B2.14 B2.15 B2.16 B2.17 B2.18 B2.19 B2.20 B2.21 B2.22 B2.23 B2.24 B2.25 B2.26 B2.28 B2.29 B2.30 B2.31 B2.32 B2.33 B2.34 B2.35 B2.38 B2.39 J1.4 J1.6 J1.9 J1.10 U1.1 U1.2 U1.9 U1.10 U1.11 U1.13 U1.14 U1.15 U1.16 U1.19 U1.20 U1.EXP

## Polygon pours and split planes (outlines as drawn)
GND on Top Layer "NONET_L01_P-001" (solid, pour order 7): 2,54 0,52 0,2 2,0 28,0 30,2 30,52 28,54
DTR on Top Layer "NONET_L01_P-001" (solid, pour order 1): 20.9,29 20.9,29.5 21.1,29.7 23.8,29.7 24.2,29.3 24.2,27.9 24,27.7 23.4,27.7 22.4,28.8 21.1,28.8
VUSB on Top Layer "NONET_L01_P-001" (solid, pour order 4): 9.5,50.5 9,50 9,40.8 10.2,39.6 10.2,36 12,35 13,34 13,31.3 13.1,31.2 16.4,31.2 16.5,31.25 16.5,31.95 16.4,32 15.6,32 15.2,32.4 15.2,36.8 11,41 11,50 10.5,50.5
+3V3 on Top Layer "NONET_L01_P-001" (solid, pour order 3): 6.8,32.5 6.5,32.2 6.5,31 6.8,30.7 11,30.7 11.3,31 11.3,32.2 11,32.5
GND on Bottom Layer "NONET_L01_P-001" (solid, pour order 2): 2,54 0,52 0,2 2,0 28,0 30,2 30,52 28,54

## Text inside footprints (layer, text, board x,y; h text height)
D1: Top Overlay "+" at 11.8,37.2 h0.76 r90
J1: Top Overlay "▲" at 10.081,42.16 h1.52
S1: Mechanical 13 "*" at 26.865,49.269 h1.27 r270
S2: Mechanical 13 "*" at 1.615,49.269 h1.27 r270